# Altium PCB 双旋翼飞控pcb.PcbDoc
Units mil, origin at the board's own origin, x right, y up, seen from the top; angles counter-clockwise.
Board outline 2235.03 x 1960.03 mil, 2 copper layers (Top Layer, Bottom Layer); 72 components, 55 nets, 279 pads, 87 vias.
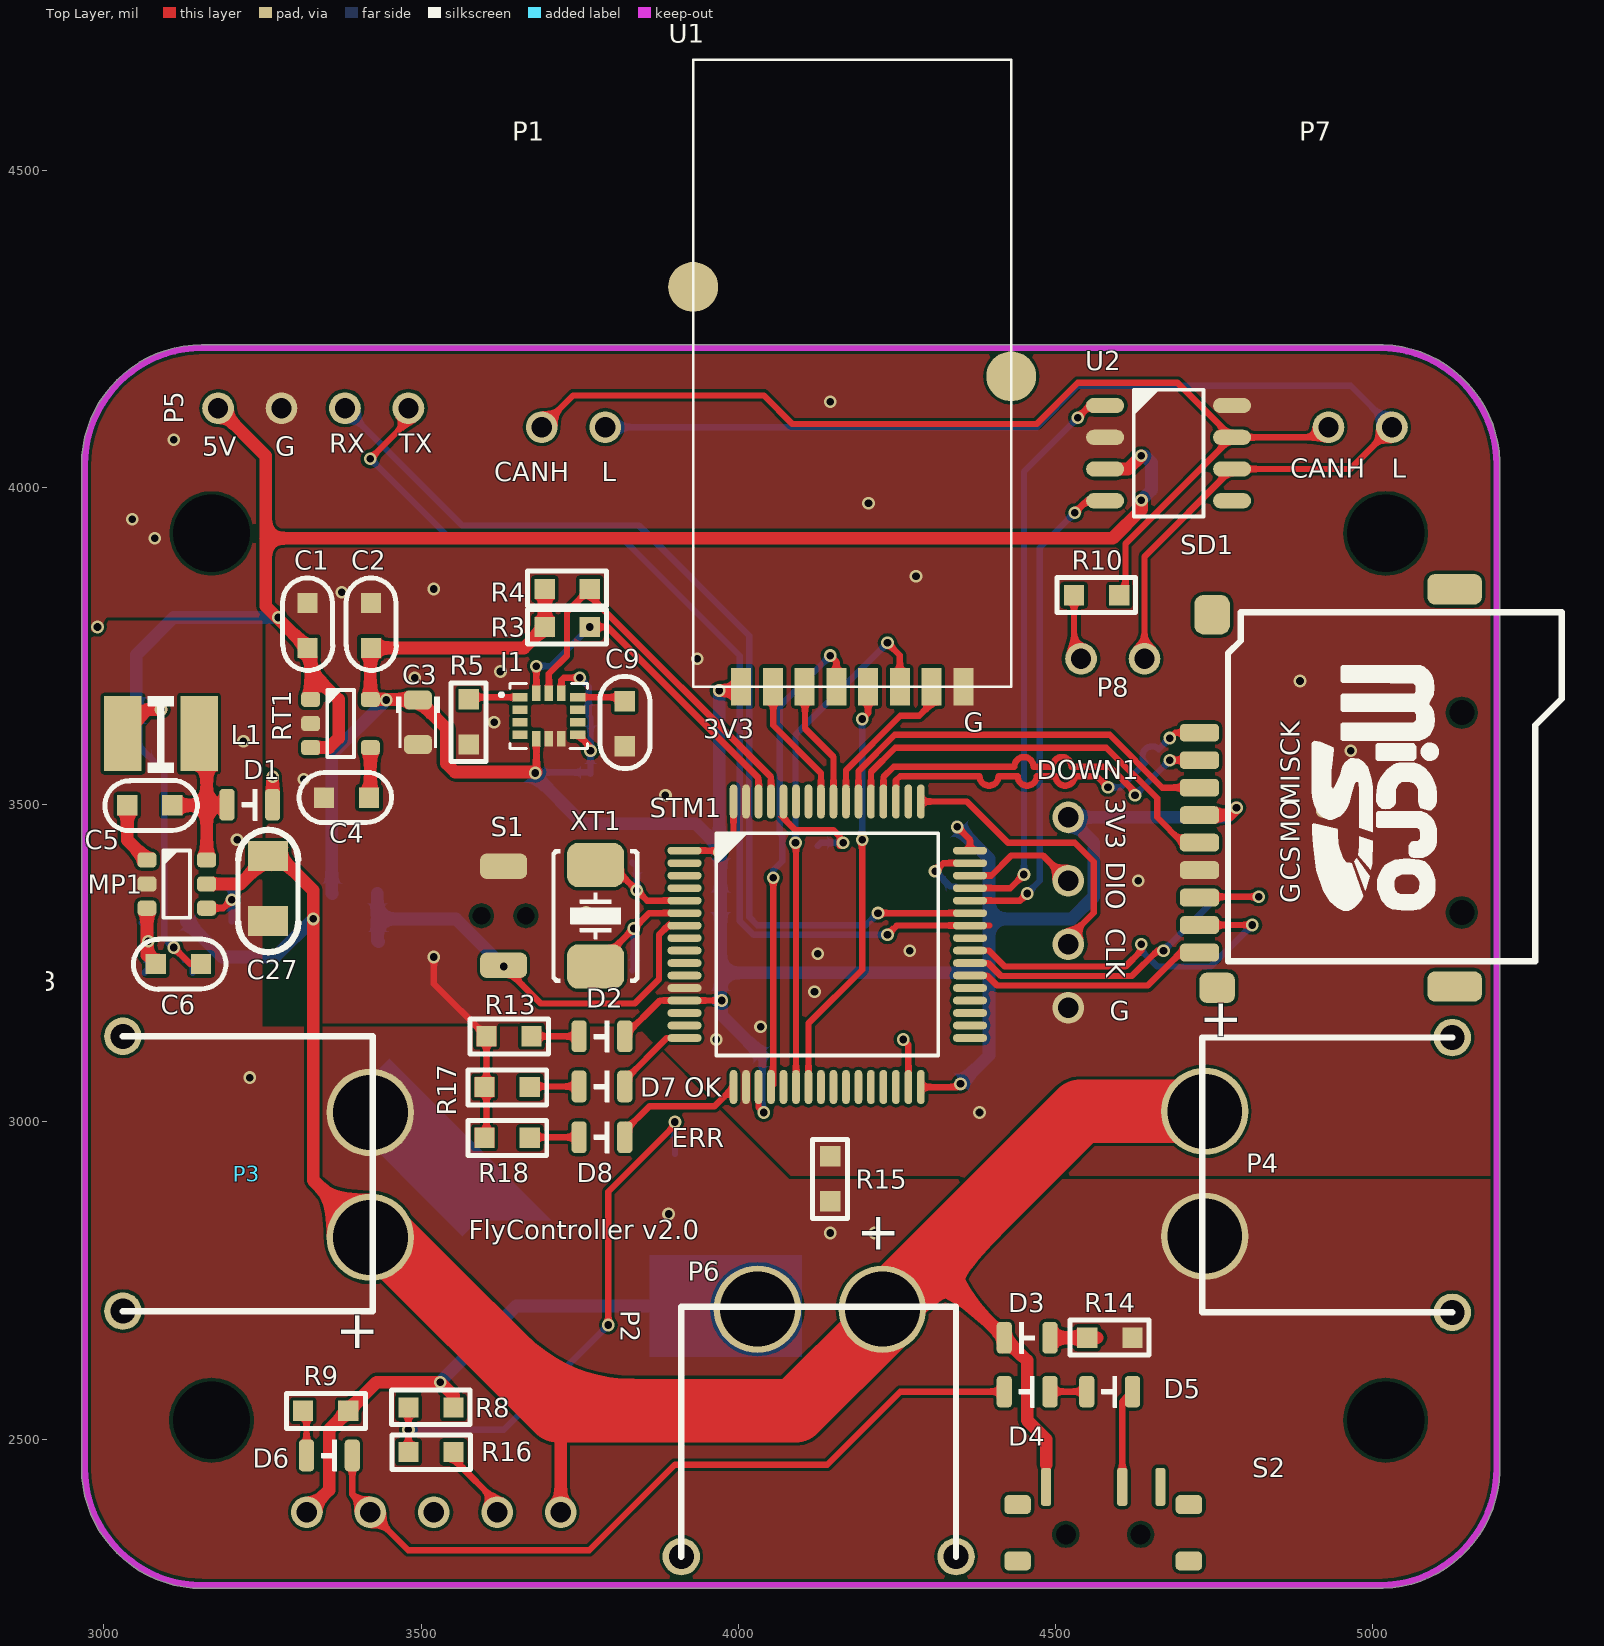
[diagram p0: Top Layer view]
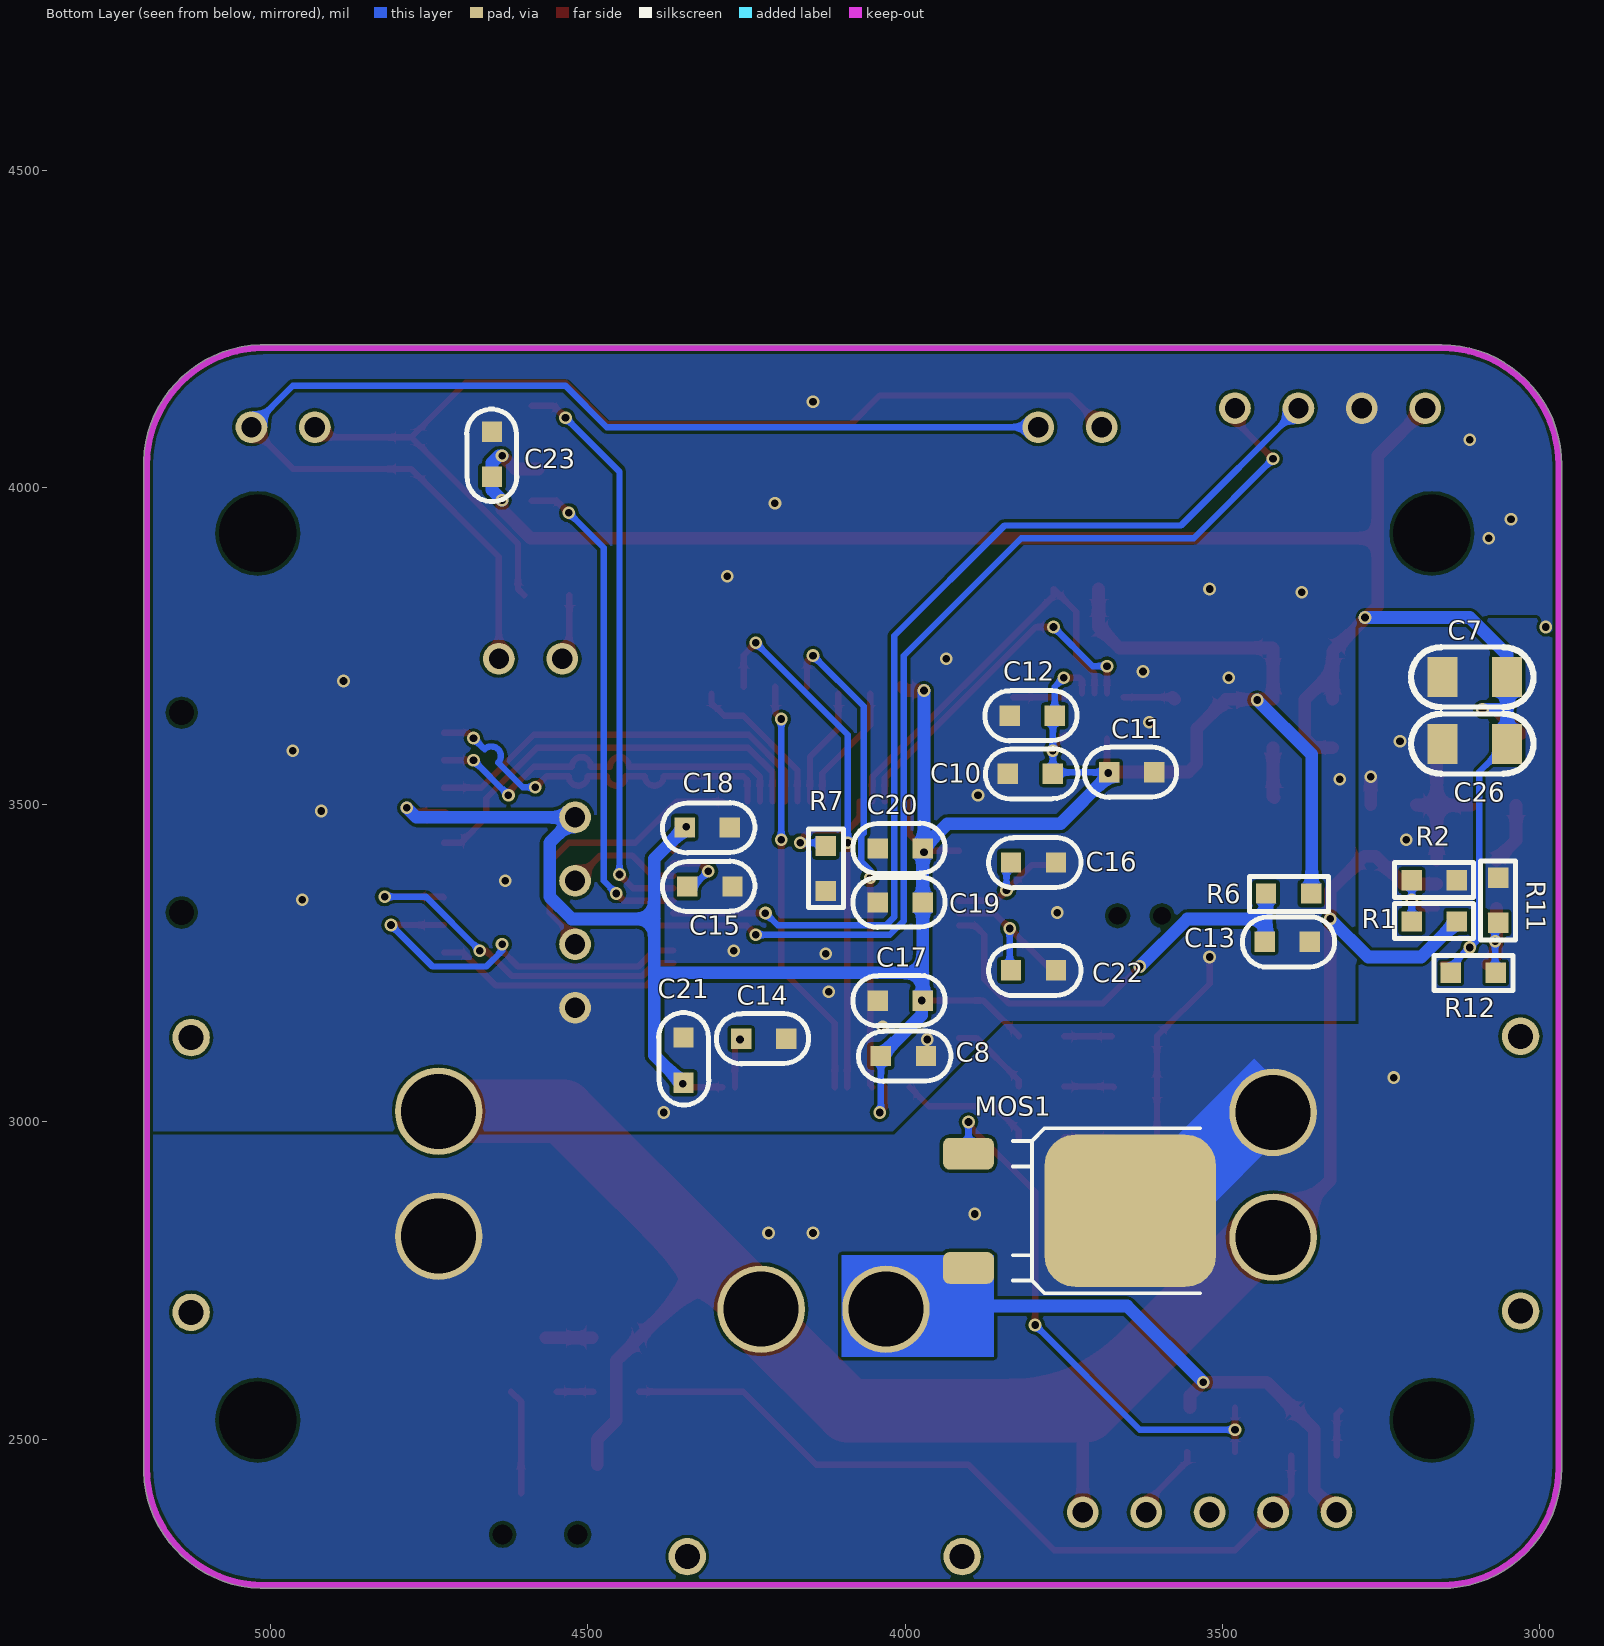
[diagram p1: Bottom Layer view, seen from below]
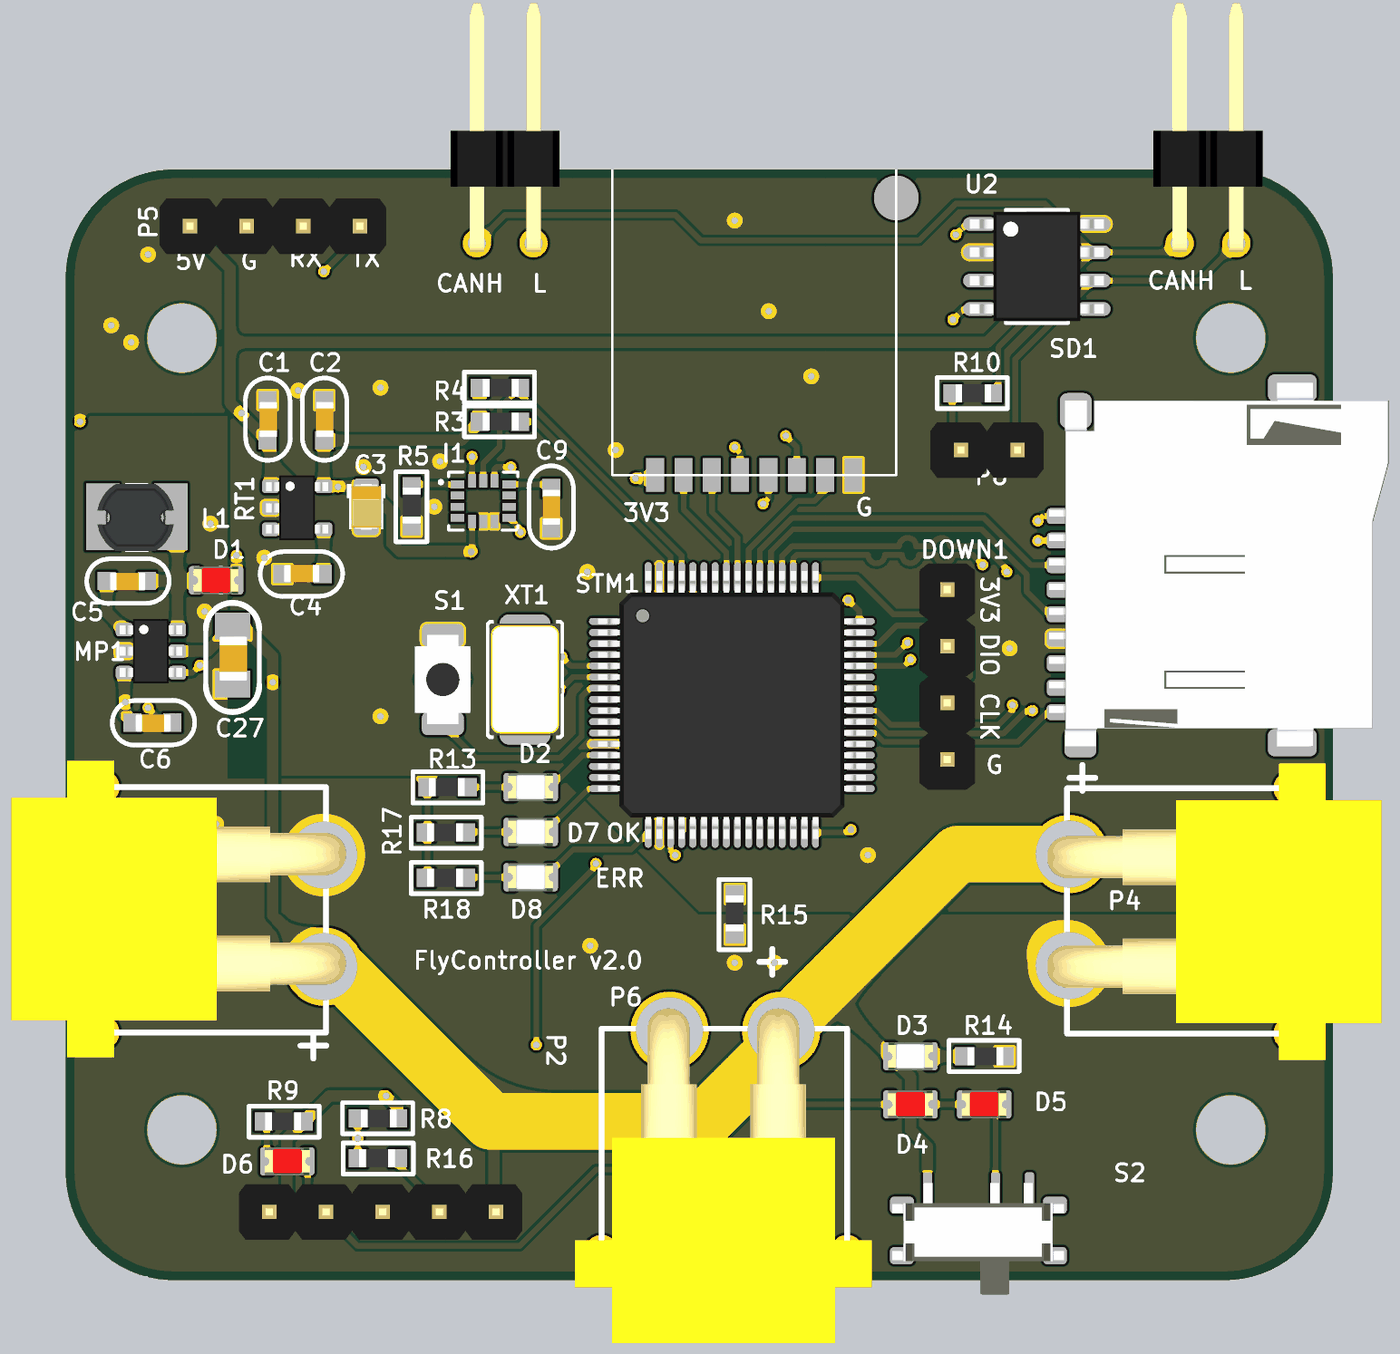
[diagram p2: 3D render of the assembled board from above, using the file's embedded part models]
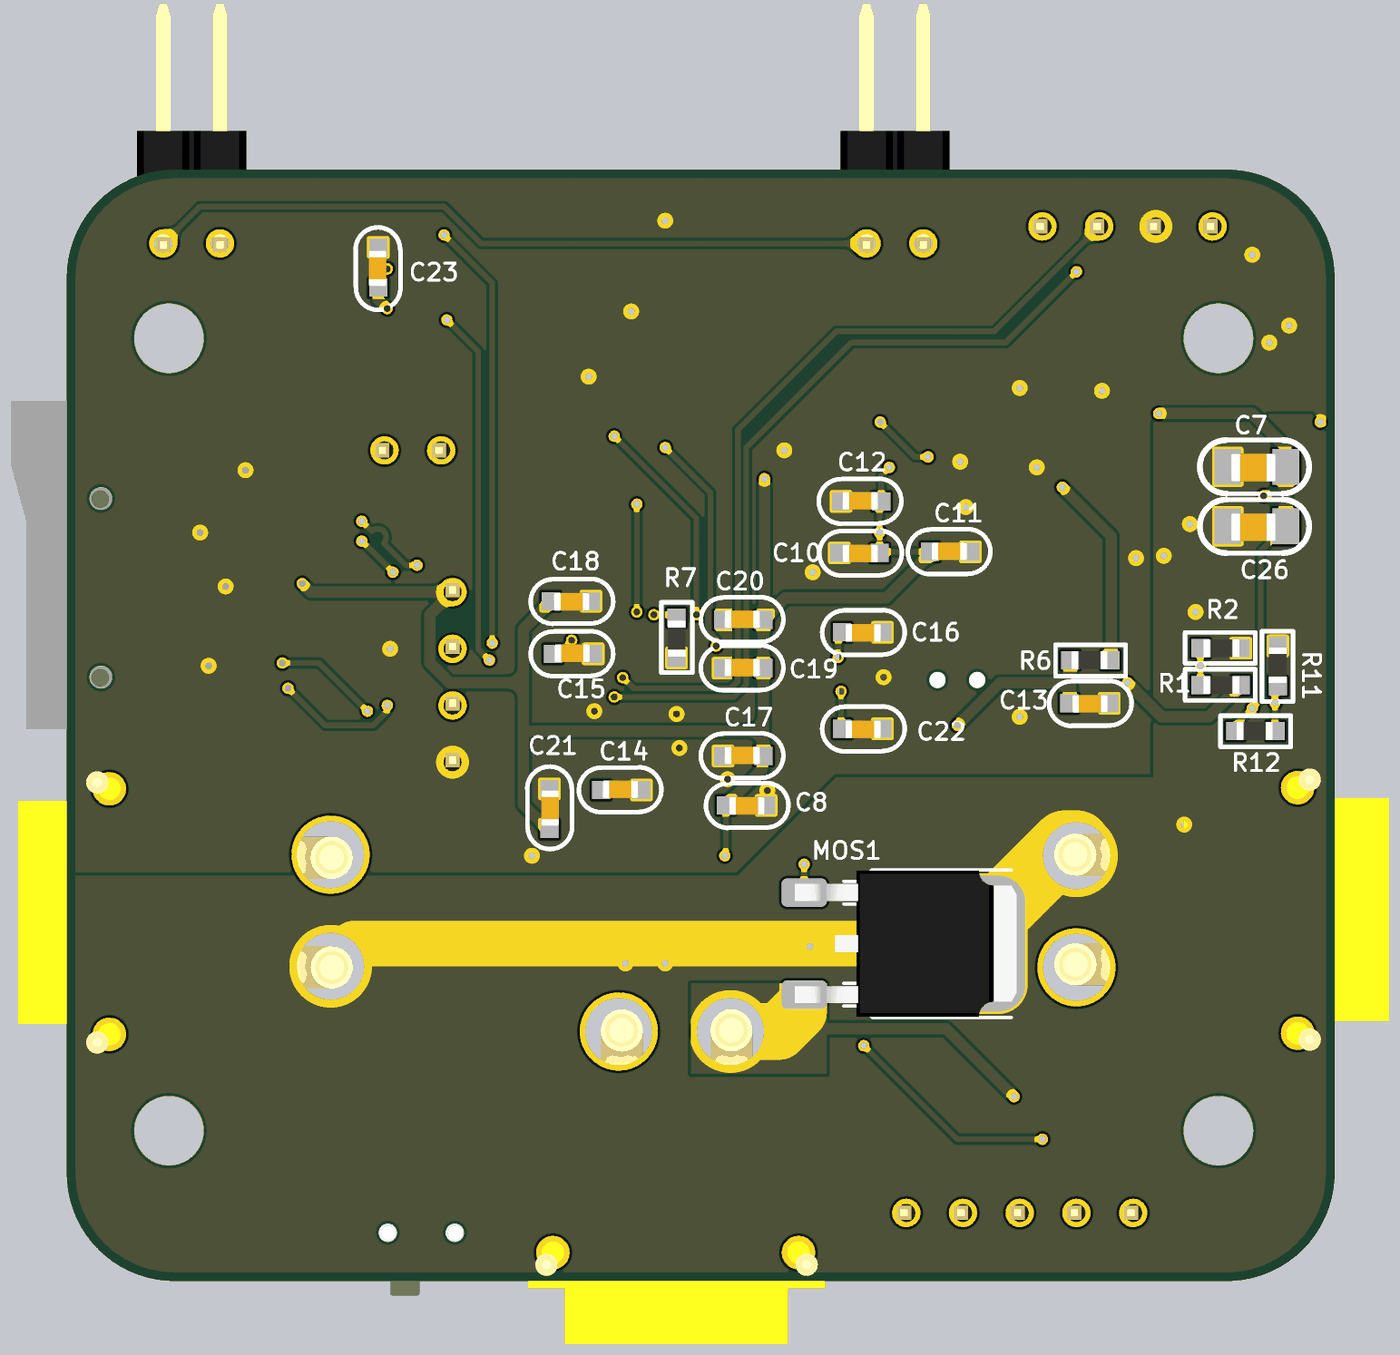
[diagram p3: 3D render of the assembled board from below, using the file's embedded part models]

## Layer stack, top to bottom
Top Solder: solder mask 0.4, Solder Resist, Dk 3.5
Top Layer: signal copper 1.4
Dielectric 1: dielectric 12.6, FR-4, Dk 4.8
Bottom Layer: signal copper 1.4
Bottom Solder: solder mask 0.4, Solder Resist, Dk 3.5

## Board outline
2964.99,2454.97 cw(c2970,2455) 2964.99,2455 2964.99,4035 cw(c3155,4035) 3154.97,4225.01 cw(c3155,4220) 3155,4225.02 5015,4225.02 cw(c5015,4220) 5015.96,4224.92 cw(c5010,4035) 5199.92,4040.96 cw(c5195,4040) 5200.02,4040 5200.02,2450 cw(c5195,2450) 5199.92,2449.04 cw(c5010,2455) 5015.96,2265.08 cw(c5015,2270) 5015,2264.99 3155,2264.99 cw(c3155,2455)

## Design rules (kind name [scope] priority, off if disabled: settings)
Clearance [All] p1: gap=5 ignorepadtopadclearanceinfootprint=FALSE
PlaneConnect [All] p1: planeconnectstyle=Direct reliefexpansion=20 reliefentries=4 reliefconductorwidth=10 reliefairgap=10
PolygonConnect [All] p1: connectstyle=Direct reliefconductorwidth=10 reliefentries=4 polygonreliefangle="90 Angle" airgapwidth=10
RoutingVias [All] p1: holewidth=28 width=50 viastyle="Through Hole" minholewidth=28 minwidth=50 maxholewidth=28 maxwidth=50
SolderMaskExpansion [All] p1: expansion=4
Width [All] p1: maxlimit=200 minlimit=10 preferedwidth=10 minimp=50.000000 maximp=50.000000 favimp=50.000000
29 further rules are at their usual default settings.

## Classes and differential pairs
component class 飞控: C8 C9 C10 C11 C12 C13 C14 C15 C16 C17 C18 C19 C20 C21 C22 D2 D3 D7 D8 DOWN1 I1 P5 R3 R4 R5 R6 R7 R13 R14 R15 R17 R18 S1 SD1 STM1 U1 XT1
component class power: C1 C2 C3 C4 C5 C6 C7 C23 C26 C27 D1 D4 D5 D6 L1 MOS1 MP1 P1 P2 P3 P4 P6 P7 P8 R1 R2 R8 R9 R10 R11 R12 R16 RT1 S2 U2

## Components (designator, comment, footprint, x,y, rotation, side; value= is the part's Value field where it differs from the comment)
C1 "Cap_0603" CAP_0603 3320,3785 r270 top value=1u
C2 "Cap_0603" CAP_0603 3420,3785 r270 top value=0.1u
C3 "Cap_Tan_0805" CAP_TAN_P0805 3495,3630 r270 top value=10u
C4 "Cap_0603" CAP_0603 3380,3510 r0 top value=22n
C5 "Cap_0603" CAP_0603 3075,3500 r180 top value=0.1u
C6 "Cap_0603" CAP_0603 3120,3250 r180 top value=33pF
C7 "Cap_0805" CAP_0805 3105,3700 r180 bottom value=10u
C8 "Cap_0603" CAP_0603 4000,3105 r0 bottom value=0.1u
C9 "Cap_0603" CAP_0603 3820,3630 r270 top value=0.1uF
C10 "Cap_0603" CAP_0603 3800,3550 r0 bottom value=0.1uF
C11 "Cap_0603" CAP_0603 3645,3550 r180 bottom value=0.1uF
C12 "Cap_0603" CAP_0603 3802,3639 r180 bottom value=0.1uF
C13 "Cap_0603" CAP_0603 3395,3285 r0 bottom value=0.1u
C14 "Cap_0603" CAP_0603 4225,3130 r180 bottom value=0.1u
C15 "Cap_0603" CAP_0603 4310,3370 r180 bottom value=0.1u
C16 "Cap_0603" CAP_0603 3795,3410 r0 bottom value=20pf
C17 "Cap_0603" CAP_0603 4010,3190 r180 bottom value=0.1u
C18 "Cap_0603" CAP_0603 4309,3465 r0 bottom value=0.1u
C19 "Cap_0603" CAP_0603 4010,3345 r180 bottom value=0.1u
C20 "Cap_0603" CAP_0603 4010,3430 r180 bottom value=0.1u
C21 "Cap_0603" CAP_0603 4350,3100 r270 bottom value=0.1u
C22 "Cap_0603" CAP_0603 3795,3240 r0 bottom value=20pf
C23 "Cap_0603" CAP_0603 4650,4050 r90 bottom value=0.1u
C26 "Cap_0805" CAP_0805 3105,3595 r180 bottom value=10u
C27 "Cap_0805" CAP_0805 3260,3365 r90 top value=10u
D1 "Diode" LED_0805_RED#1 3230,3500 r180 top
D2 "D_0805" LED_0805_YELLOW#1 3785,3135 r180 top
D3 "D_0805" LED_0805_YELLOW#1 4455,2660 r0 top
D4 "Diode" LED_0805_RED#1 4455,2575 r180 top
D5 "Diode" LED_0805_RED#1 4585,2575 r180 top
D6 "LED_0805" LED_0805_RED#2 3355,2475 r0 top
D7 "D_0805" LED_0805_YELLOW#2 3785,3055 r0 top
D8 "D_0805" LED_0805_YELLOW#2 3785,2975 r0 top
DOWN1 "HDR1x4_2.54" HDR1x4_2.54_180 4520,3480 r0 top
I1 "ICM20600" ICM20600 3700,3640 r0 top
L1 "Ind_CD32" IND_CD52 3090,3605 r180 top value=10uH
MOS1 "MOSFET_N" TO-252AA 3900,2950 r270 bottom value=NMOS?
MP1 "MP2451" SOT23-6 3115,3375 r0 top
P1 "HDR1x2_2.54" HDR1X2_2.54_90 3690,4095 r90 top
P2 "HDR1x5_2.54" HDR1X5_2.54_180 3720,2385 r270 top
P3 "Connector" XT30_PW_M 3140,2765 r90 top
P4 "Connector" XT30_PW_M 5015,3070 r270 top
P5 "HDR1x4_2.54" HDR1x4_2.54_180 3480,4125 r270 top
P6 "Connector" XT30_PW_M 4280,2425 r180 top
P7 "HDR1x2_2.54" HDR1X2_2.54_90 4930,4095 r90 top
P8 "HDR1x2_2.54" HDR1X2_2.54_180 4640,3730 r270 top
R1 "Res_0603" RES_0603 3164.41,3398 r180 bottom value=20K
R2 "Res_0603" RES_0603 3164.41,3463 r180 bottom value=10K
R3 "Res_0603" RES_0603 3732,3862 r0 top value=10K
R4 "Res_0603" RES_0603 3732,3922 r0 top value=10K
R5 "Res_0603" RES_0603 3493,3632 r90 top value=10K
R6 "Res_0603" RES_0603 3397,3278 r0 bottom value=10K
R7 "Res_0603" RES_0603 4043,3398 r270 bottom value=10K
R8 "Res_0603" RES_0603 3517,2632 r0 top value=4.7K
R9 "Res_0603" RES_0603 3348,2463 r180 top value=4.7K
R10 "Res_0603" RES_0603 4566,3912 r0 top value=120R
R11 "Res_0603" RES_0603 3147,3351 r90 bottom value=56K
R12 "Res_0603" RES_0603 3106,3153 r0 bottom value=300K
R13 "Res_0603" RES_0603 3637,3053 r180 top value=10K
R14 "Res_0603" RES_0603 4587,2742 r0 top value=10K
R15 "Res_0603" RES_0603 4063,2912 r90 top value=0R
R16 "Res_0603" RES_0603 3514,2398 r180 top value=10R
R17 "Res_0603" RES_0603 3634,2973 r180 top value=10K
R18 "Res_0603" RES_0603 3634,2893 r180 top value=10K
RT1 "RT9193" SOT23-5 3373,3628 r0 top
S1 "ButtonTACT_3x4x2_180" ButtonTACT_3x4x2_180H 3630,3325 r90 top
S2 "SwitchSPDT_2.8x6.6_90" SwitchSPDT_2.8X6.6_90 4575,2350 r0 top
SD1 "SD_Card_TF" SD_Card_TF 4726.61,3613.5 r270 top
STM1 "STM32F4" LQFP_P0.5_64 4140,3280 r0 top
U1 "NRF24l01_E01_SPI3" E01-ML01SP2 4425.24,3694.88 r90 top
U2 "TJA1050" SOP_E150_8 4680,4050 r270 top
XT1 "XTAL_5032_2P" XT_5032_2 3775,3325 r90 top value=8M

## Footprints (in the part's own frame and the unit in brackets; to place one, negate y for a bottom-side part, rotate by r counter-clockwise, add the part's x,y. Pads: shape width x height; smd on the part's side, far side on the other; paste and mask are expansions set on the pad)
ButtonTACT_3x4x2_180H [mil]
  round 0 hole 28: 0(0,35) 0(0,-35)
  rrect50% 40x74 smd: 1(-78,0) 2(78,0)
  body extent -79,-49 79,49, height 63
CAP_0603 [mil]
  rect 32x32 smd: 1(-33,1) 2(38,1)
  silkscreen extent -72,-38 73,41, body extent -30,-14 33,18, height 31
CAP_0805 [mil]
  rect 47.24x62.99 smd: 1(-48,1) 2(54,1)
  silkscreen extent -98,-46 95,48, body extent -42,-25 36,24, height 39
CAP_TAN_P0805 [mil]
  rrect50% 30x44 smd: 1(-35,0) 2(35,0)
  silkscreen extent -40,-34 40,34, body extent -40,-27 40,27, height 59
E01-ML01SP2 [mm]
  rect 1.5x0.8 smd: 1(-0.225,10.689) 2(-0.225,9.419) 3(-0.225,8.149) 4(-0.225,6.879) 5(-0.225,5.609) 6(-0.225,4.339) 7(-0.225,3.069) 8(-0.225,1.799)
  round 2 smd: 10(12.195,-0.121) 11(15.775,12.609)
  silkscreen extent -0.23,-0.12 24.87,12.61
HDR1X2_2.54_90 [mil]
  round 50 hole 32: 1(0,0) 2(0,-100)
  body extent -15,-146 424,46, height 99
HDR1X2_2.54_180 [mil]
  round 50 hole 32: 1(0,0) 2(0,-100)
  body extent -49,-150 49,50, height 323
HDR1x4_2.54_180 [mil]
  round 50 hole 32: 1(0,0) 2(0,-100) 3(0,-200) 4(0,-300)
  body extent -49,-350 49,50, height 323
HDR1X5_2.54_180 [mil]
  round 50 hole 32: 1(0,0) 2(0,-100) 3(0,-200) 4(0,-300) 5(0,-400)
  body extent -49,-450 49,50, height 323
ICM20600 [mm]
  rect 0.61x0.35 smd: 1(-1.127,0.746) 2(-1.127,0.246) 3(-1.127,-0.254) 4(-1.127,-0.754) 8(1.193,-0.754) 9(1.193,-0.254) 10(1.193,0.246) 11(1.193,0.746)
  rect 0.35x0.61 smd: 5(-0.467,-0.914) 6(0.033,-0.914) 7(0.533,-0.914) 12(0.533,0.906) 13(0.033,0.906) 14(-0.467,0.906)
  silkscreen extent -1.94,-1.3 1.58,1.3
IND_CD52 [mil]
  rect 59.06x118.11 smd: 1(-60,-7) 2(60,-7)
  silkscreen extent -20,-66 20,54, body extent -66,-65 70,53, height 83
LED_0805_RED#1 [mil]
  rrect50% 24x50 smd: 1(-36,0) 2(36,0)
  silkscreen extent -12,-24 12,24, body extent -40,-25 40,25, height 43
LED_0805_RED#2 [mil]
  rrect50% 24x50 smd: 1(36.5,-0.5) 2(-35.5,-0.5)
  silkscreen extent -12,-25 12,24, body extent -39,-25 40,24, height 43
LED_0805_YELLOW#1 [mil]
  rrect50% 24x50 smd: 1(-36,0) 2(36,0)
  silkscreen extent -12,-24 12,24, body extent -40,-25 40,25, height 43
LED_0805_YELLOW#2 [mil]
  rrect50% 24x50 smd: 1(36,1) 2(-36,1)
  silkscreen extent -12,-24 12,26, body extent -40,-24 40,26, height 43
LQFP_P0.5_64 [mil]
  oval 54x12 smd: 1(-225,147.64) 2(-225,127.95) 3(-225,108.27) 4(-225,88.58) 5(-225,68.9) 6(-225,49.21) 7(-225,29.53) 8(-225,9.84) 9(-225,-9.84) 10(-225,-29.53) 11(-225,-49.21) 12(-225,-68.9) 13(-225,-88.58) 14(-225,-108.27) 15(-225,-127.95) 16(-225,-147.64) 33(225,-147.64) 34(225,-127.95) 35(225,-108.27) 36(225,-88.58) 37(225,-68.9) 38(225,-49.21) 39(225,-29.53) 40(225,-9.84) 41(225,9.84) 42(225,29.53) 43(225,49.21) 44(225,68.9) 45(225,88.58) 46(225,108.27) 47(225,127.95) 48(225,147.64)
  oval 12x54 smd: 17(-147.64,-225) 18(-127.95,-225) 19(-108.27,-225) 20(-88.58,-225) 21(-68.9,-225) 22(-49.21,-225) 23(-29.53,-225) 24(-9.84,-225) 25(9.84,-225) 26(29.53,-225) 27(49.21,-225) 28(68.9,-225) 29(88.58,-225) 30(108.27,-225) 31(127.95,-225) 32(147.64,-225) 49(147.64,225) 50(127.95,225) 51(108.27,225) 52(88.58,225) 53(68.9,225) 54(49.21,225) 55(29.53,225) 56(9.84,225) 57(-9.84,225) 58(-29.53,225) 59(-49.21,225) 60(-68.9,225) 61(-88.58,225) 62(-108.27,225) 63(-127.95,225) 64(-147.64,225)
  silkscreen extent -175,-175 175,175, body extent -236,-236 236,236, height 59
RES_0603 [mil]
  rect 32x32 smd: 1(-37,-82) 2(34,-82)
  silkscreen extent -64,-109 60,-54, body extent -31,-98 31,-66, height 18
SD_Card_TF [mil]
  rrect50% 48x86 smd: 0(-226,402) 0(400,402)
  rrect50% 62x56 smd: 0(-186,20)
  round 30 hole 39.37 mask+0: 0(-31.5,413.39) 0(283.46,413.39)
  rrect50% 48x56 smd: 0(402,28)
  rrect50% 28x62 smd: 1(0,0) 2(43.31,0) 3(86.61,0) 4(129.92,0) 5(173.23,0) 6(216.54,0) 7(259.84,0) 8(303.15,0) 9(346.46,0)
  silkscreen extent -190,45 360,571, body extent -235,-27 407,572, height 79
SOP_E150_8 [mil]
  oval 24x60 smd: 1(-79,-102) 2(-29,-102) 3(21,-102) 4(71,-102) 5(71,98) 6(21,98) 7(-29,98) 8(-79,98)
  silkscreen extent -104,-57 96,53, body extent -100,-120 92,116, height 69
SOT23-5 [mil]
  rrect50% 30x24 smd: 1(-47,38) 2(-47,0) 3(-47,-38) 4(47,-38) 5(47,38)
  silkscreen extent -21,-53 21,53, body extent -55,-57 55,57, height 57
SOT23-6 [mil]
  rrect50% 30x24 smd: 1(-47,38) 2(-47,0) 3(-47,-38) 4(47,-38) 5(47,0) 6(47,38)
  silkscreen extent -21,-53 21,53, body extent -55,-57 55,57, height 57
SwitchSPDT_2.8X6.6_90 [mil]
  rrect50% 42x30 smd: 0(-135,-42) 0(-135,47) 0(135,-42) 0(135,47)
  round 10 hole 31.5: 0(-59.06,0) 0(59.06,0)
  rrect50% 16x60 smd: 1(90,75) 2(30,75) 3(-90,75)
  body extent -152,-111 151,86, height 55
TO-252AA [mil]
  rrect40% 50x80 smd: 1(0,0) 3(180,0)
  rrect40% 240x270 smd: 4(90,255)
  silkscreen extent -40,70 220,365, body extent -39,-17 219,374, height 91
XT30_PW_M [mm]
  round 1.5 hole 1: 0(-1.602,2.794) 0(9.398,2.794)
  round 3.5 hole 3: 1(1.35,-7.112) 2(6.35,-7.112)
  silkscreen extent -1.6,-7.21 9.4,2.79, body extent -2.71,-8.12 10.59,6.89, height 5
XT_5032_2 [mil]
  rrect50% 70x90 smd: 1(-80,0) 2(80,0)
  silkscreen extent -104,-68 104,68, body extent -98,-63 98,63, height 39

## Part data
C1 C2 C3 C4 C5 C6 C7 C8 C9 C10 C11 C12 C13 C14 C15 C16 C17 C18 C19 C20 C21 C22 C23 C26 C27: "Capacitor"
D6: "LED"
DOWN1 P1 P2 P5 P7 P8: "Header"
L1: "Inductor"
MOS1: "MOSFET"
P3 P4 P6: library part 2P
R1 R2 R3 R4 R5 R6 R7 R8 R9 R10 R11 R12 R13 R14 R15 R16 R17 R18: "Resistor"
RT1: "Power"
S1: "Button"
S2: "Switch"
SD1: "SD"
STM1: library part STM32F405R, "MCU"
U1: library part NRF24l01_E01_SPI2
XT1: "Crystal Oscillator"

## Free pads (board coordinates)
  round 30 hole 122.05: 3(3169.68,2530) 3(3169.68,3927.64) 3(5020,2530) 3(5020,3927.64)

## Via types
v1: diameter 20, hole 12, Top Layer to Bottom Layer, 87 vias

## Nets (pads, with @x,y where several pads share a name; then routed paths per layer and width w, separated by ;. In a path a pad name is that pad's centre, name@x,y a point inside that pad or via, vN(x,y) a via of type N, cw(c..) or ccw(c..) an arc to the next point about the centre after c; other vN are vias at no path point)
3V3: C2.2 C3.1 C8.2 C10.1 C11.1 C12.2 C17.2 C18.2 C19.2 C20.2 C21.2 D2.1 DOWN1.1 I1.5 I1.8 I1.12 R3.1 R4.1 R6.1 RT1.5 SD1.4 STM1.1 STM1.13 STM1.19 STM1.32 STM1.48 STM1.64 U1.1 | length 4610.9
  Top Layer w10: v1@3681.63,3551.63 I1.5 ; I1.12 3721,3696 3725,3700 v1(3750,3700) ; I1.8 3767,3590.28 v1(3767,3585) ; D2.1 3821,3136 3876.42,3191.42 STM1.13 v1(3973.58,3191.42) ; STM1.1 3967.36,3427.64 3992.36,3452.64 STM1.64 ; STM1.19 4031.73,3023.27 v1(4040,3015) ; STM1.32 4345,3055 v1(4350,3060) ; v1(4345,3465) 4365,3445 STM1.48
  Top Layer w20: v1@3681.63,3551.63 3553.37,3551.63 3540,3565 3540,3620 C3.1 3494,3666 RT1.5 3420,3746 C2.2 3662,3747 R3.1 R4.1 ; v1(3970,3680) 3998.39,3680 U1.1 ; SD1.4 4773.58,3483.58 v1(4785,3495)
  Bottom Layer w10: C11.1 3765,3551 C10.1 v1(3767,3585) 3767,3637 C12.2 3764,3686 v1(3750,3700) ; 3965,3460 3965,3438 3965,3432.22 3970,3427.22 C20.2@3972,3425.22 ; C8.2 4038,3017 v1(4040,3015)
  Bottom Layer w20: R6.1 3359,3361 3359,3579 v1(3445,3665) ; v1(3680,3550) 3680,3545 3755,3470 3933,3470 3965,3438 C20.2@3970,3433 ; C17.2@3967,3191 3972,3196 3972,3235 ; v1(3970,3425) 3970,3427.22 C20.2@3970,3433 ; v1(3970,3680) C20.2@3970,3433 ; v1(3973.58,3191.42) 3973.58,3168.42 C8.2 ; v1(4345,3465) 4395,3415 4395,3320 ; v1(4350,3060) 4395,3105 4395,3240 ; v1(4785,3495) 4770,3480 DOWN1.1 4560,3440 4560,3355 4525,3320 4395,3320 ; C20.2@3970,3433 C20.2 3972,3425.22 C19.2 3972,3235 ; 3972,3235 4390,3235 4395,3240 ; 4395,3240 4395,3320
5V: C1.2 C6.1 C7.2 C23.1 C26.2 L1.2 P5.4 R12.2 RT1.1 RT1.3 U2.3 | length 3215.3
  Top Layer w10: v1(3110,3275) 3136,3249 C6.1
  Top Layer w20: L1.2 3068,3650 v1(3090,3650) ; P5.4 3255,4050 3255,3920 ; RT1.3 3355,3590 3370,3605 3370,3666 3326,3710 ; RT1.1 3326,3710 ; U2.3 4614,4029 v1(4635,4050) ; v1(4635.18,3980) 4635.18,3965.18 4590,3920 3255,3920 ; 3255,3920 3255,3813 C1.2 3326,3742 3326,3710
  Bottom Layer w10: C26.2 3095,3552 3095,3290 v1(3110,3275) 3140,3245 R12.2
  Bottom Layer w20: C26.2 3051,3645 ; v1(3090,3650) 3056,3650 3051,3645 ; v1(3275,3795) 3110,3795 3051,3736 C7.2 3051,3645 ; v1(4635,4050) 4640,4050 4651,4039 C23.1 4651,3995.82 v1(4635.18,3980)
10V: D4.2 D6.1 P2.4 | length 1228.7
  Top Layer w10: D6.1 3391.5,2413.5 P2.4 3480,2325 3765,2325 3900,2460 4140,2460 4255,2575 D4.2
BGND: MOS1.3 P2.5 P6.2 R8.2 R9.1 | length 824
  Top Layer w20: P2.5 3355,2420 3355,2515 R9.1 3430,2590 v1(3530,2590) 3551,2569 R8.2
  Bottom Layer w20: v1(3530,2590) 3650,2710 3905,2710
CAN_RX: STM1.44 U2.4 | length 791.5
  Top Layer w10: STM1.44 4443.9,3348.9 v1(4455,3360) ; v1(4530,3960) 4549,3979 U2.4 U2.4@4588,3979
  Bottom Layer w10: v1(4455,3360) 4475,3380 4475,3905 v1(4530,3960)
CAN_TX: STM1.45 U2.1 | length 909.9
  Top Layer w10: STM1.45 4428.58,3368.58 v1(4450,3390) ; v1(4535,4110) 4554,4129 U2.1 U2.1@4588,4129
  Bottom Layer w10: v1(4450,3390) 4450,4025 v1(4535,4110)
CANH: P1.1 P7.1 R10.2 U2.7 | length 1671.3
  Top Layer w10: P1.1 3740,4145 4040,4145 4085,4100 4470,4100 4535,4165 4692,4165 U2.7 ; R10.2 4610,3840 4610,3911 U2.7 ; P7.1 4914,4079 U2.7
CANL: P1.2 P7.2 P8.1 U2.6 | length 1929.3
  Top Layer w10: P8.1 4640,3891 U2.6 4964,4029 P7.2
  Bottom Layer w10: P1.2 4470,4095 4535,4160 4965,4160 P7.2
ENA: MP1.4 R1.1 R2.1 | length 109.8
  Top Layer w10: MP1.4 3188.41,3337 v1(3201.41,3350)
  Bottom Layer w10: R1.1 v1(3201.41,3350) R2.1
GND: C1.1 C2.1 C3.2 C4.1 C8.1 C9.2 C10.2 C11.2 C12.1 C13.1 C14.2 C15.2 C16.1 C17.1 C18.1 C19.1 C20.1 C21.1 C22.1 C23.2 DOWN1.4 I1.6 I1.7 P5.3 R5.1 R7.2 R13.2 R15.2 R17.2 R18.2 RT1.2 S1.2 SD1.6 STM1.12 STM1.18 STM1.63 U1.8 U2.2 U2.8 | length 320.6
  Top Layer w10: v1(3520,3260) 3520,3218 R13.2 3603,2978 R18.2
  other v1: 4380,3015 3965,3130 4035,3150 4120,3205 4125,3265 4270,3270 3760,3330 4950,3350 4630,3380 4920,3490 3885,3515 3315,3540 4965,3585 3615,3630 4885,3695 3490,3700 3625,3710 3935,3730 2990,3780 3375,3835 3520,3840 4280,3860 3080,3920 3045,3950 4205,3975 3110,4075 4145,4135
LED_ERROR: D8.1 STM1.17 | length 209.9
  Top Layer w10: D8.1 3821,2986 3860,3025 3962.36,3025 STM1.17
LED_OK: D7.1 STM1.16 | length 131.5
  Top Layer w10: D7.1 3821,3066 3887.36,3132.36 STM1.16
NetC4_2: C4.2 RT1.4 | length 79.8
  Top Layer w20: C4.2 3420,3513 RT1.4
NetC5_1: C5.1 D1.2 L1.1 MP1.6 | length 290.4
  Top Layer w20: C5.1 3162,3499 ; L1.1 3162,3600 3162,3499 ; MP1.6 3162,3499 ; D1.2 3193,3499 3162,3499
NetC5_2: C5.2 MP1.1 | length 98.8
  Top Layer w20: C5.2 3037,3444 MP1.1
NetC6_2: C6.2 MP1.3 R11.1 R12.1 | length 179.4
  Top Layer w20: MP1.3 3068,3263 C6.2
  Bottom Layer w10: R11.1@3060,3314 3070,3304 v1(3070,3285) 3070,3241 R12.1@3064,3235
NetC9_1: C9.1 I1.11 | length 82.7
  Top Layer w10: I1.11 C9.1@3829.65,3669.35
NetC14_1: C14.1 STM1.31 | length 78.3
  Top Layer w10: v1(4260,3130) 4267.95,3122.05 STM1.31
NetC15_1: C15.1 STM1.47 | length 103.3
  Top Layer w10: v1(4310,3395) 4322.95,3407.95 STM1.47
  Bottom Layer w10: v1(4310,3395) 4334,3371 C15.1
NetD2_2: D2.2 R13.1 | length 75
  Top Layer w10: R13.1 D2.2
NetD3_2: D3.2 R14.1 | length 73
  Top Layer w20: D3.2@4492.71,2660 R14.1 R14.1@4565.71,2660
NetD4_1: D4.1 D5.2 | length 58
  Top Layer w10: D4.1 D5.2
NetD5_1: D5.1 S2.2 | length 166.6
  Top Layer w10: S2.2@4605,2415 S2.2 4605,2559 D5.1
NetD6_2: D6.2 R9.2 | length 72.8
  Top Layer w10: R9.2 3319.5,2539.5 D6.2
NetD7_2: D7.2 R17.1 | length 78.4
  Top Layer w10: R17.1 3672,3056 D7.2
NetD8_2: D8.2 R18.1 | length 78.4
  Top Layer w10: R18.1 3672,2976 D8.2
NetI1_1: I1.1 R5.2 | length 82
  Top Layer w10: R5.2@3578.35,3669.35 I1.1
  Top Layer w20: R5.2 R5.2@3578.35,3669.35
NetMOS1_1: MOS1.1 R8.1 R16.2 | length 866.8
  Top Layer w10: R16.2 v1(3480,2515) R8.1 ; v1(3795,2680) 3795,2890 3900,2995 v1(3900,3000)
  Bottom Layer w10: v1(3480,2515) 3630,2515 v1(3795,2680) ; MOS1.1 v1(3900,3000)
NetP2_2: P2.2 R16.1 | length 121.9
  Top Layer w10: R16.1@3555,2480 3555,2465 3620,2400 P2.2
NetP8_2: P8.2 R10.1 | length 104.6
  Top Layer w10: R10.1 4529,3741 P8.2
NetR7_1: R7.1 STM1.60 | length 191.1
  Top Layer w10: STM1.60 4071.1,3478.9 4090,3460 4150,3460 4160,3450 4160,3435 v1(4165,3440)
  Bottom Layer w10: R7.1 4130,3440 v1(4165,3440)
NRF_CE: STM1.57 U1.2 | length 201.1
  Top Layer w10: U1.2@4055,3675 4055,3625 4130.16,3549.84 STM1.57
NRF_CSN: STM1.56 U1.3 | length 188.6
  Top Layer w10: U1.3@4105,3675 4105,3620 4149.84,3575.16 STM1.56
NRF_IRQ: STM1.55 U1.7 | length 243.7
  Top Layer w10: STM1.55 4169.53,3554.53 4255,3640 4285,3640 4305,3660 U1.7@4305,3675
NRF_MISO: STM1.22 U1.6 | length 837.4
  Top Layer w10: v1(4090,3440) 4090.79,3439.21 STM1.22 ; v1(4235,3755) 4254.41,3735.59 U1.6
  Bottom Layer w10: v1(4090,3440) 4090,3610 v1(4235,3755)
NRF_MOSI: STM1.23 U1.5 | length 669.9
  Top Layer w10: STM1.23 4110.47,3155.47 4195,3240 v1(4195,3445) ; v1(4195,3635) 4204.41,3644.41 U1.5
  Bottom Layer w10: v1(4195,3445) v1(4195,3635)
NRF_SCK: STM1.20 U1.4 | length 774.8
  Top Layer w10: STM1.20 4055,3058.58 v1(4055,3385) ; v1(4145,3735) 4154.41,3725.59 U1.4
  Bottom Layer w10: v1(4055,3385) 4055,3396.86 4069,3410.86 4069,3451.14 4065.14,3455 4065.14,3655.14 v1(4145,3735)
NRST: C13.2 R6.2 S1.1 STM1.7 | length 707.9
  Top Layer w10: v1(3630,3245) 3688.27,3186.73 3836.73,3186.73 3875,3225 3875,3295 3889.53,3309.53 STM1.7
  Bottom Layer w20: R6.2 3431,3320 ; C13.2 3431,3286 3431,3320 ; v1(3630,3245) 3555,3320 3431,3320
OSC1: C16.2 STM1.5 XT1.2 | length 210.1
  Top Layer w10: XT1.2 3800,3405 v1(3840,3365) 3856.1,3348.9 STM1.5
  Bottom Layer w10: C16.2 3840,3402 v1(3840,3365)
OSC2: C22.2 STM1.6 XT1.1 | length 241.7
  Top Layer w10: XT1.1 v1(3835,3305) 3859.21,3329.21 STM1.6
  Bottom Layer w10: C22.2 3835,3241 v1(3835,3305)
PGND: C7.1 C26.1 C27.1 D1.1 MOS1.4 MP1.2 P3.2 P4.2 R2.2 R11.2 R14.2 R15.1 | length 44
  Top Layer w20: D1.1 v1(3266,3544)
  other v1: 4145,2825 4215,2825 3890,2855 3230,3070 3210,3445 3220,3600
SCL: I1.13 R4.2 STM1.61 | length 644.4
  Top Layer w10: I1.13 3701.32,3706.32 3730,3735 3730,3804 R4.2 3766,3829 4051.42,3543.58 STM1.61
SDA: I1.14 R3.2 STM1.62 | length 554
  Top Layer w10: I1.14 v1(3681.63,3718.37) ; v1(3766,3780) 3793.79,3780 4031.73,3542.05 STM1.62
  Bottom Layer w10: v1(3681.63,3718.37) 3704.37,3718.37 v1(3766,3780)
SDIO_CD: SD1.9 STM1.38 | length 389.7
  Top Layer w10: STM1.38 4391.79,3230.79 4407.57,3215 4645,3215 4697.05,3267.05 SD1.9
SDIO_CLK: SD1.5 STM1.53 | length 659.7
  Top Layer w10: STM1.53 4208.9,3551.47 4247.43,3590 4580,3590 4660,3510 4660,3480 4699.73,3440.28 SD1.5
SDIO_CMD: SD1.3 STM1.54 | length 643.4
  Top Layer w10: STM1.54 4189.21,3553 4246.21,3610 4585,3610 4668.11,3526.89 SD1.3
SDIO_D0: SD1.7 STM1.39 | length 610.3
  Top Layer w10: STM1.39 4393.31,3250.47 4413.79,3230 4620,3230 4660,3270 v1(4670,3270) ; SD1.7 4727.95,3355 v1(4820,3355)
  Bottom Layer w10: v1(4670,3270) 4755,3355 4756.34,3353.66 4757.68,3355 v1(4820,3355)
SDIO_D1: SD1.8 STM1.40 | length 606.6
  Top Layer w10: STM1.40 4394.84,3270.16 4420,3245 4610,3245 4635,3270 v1(4635,3280) ; SD1.8 v1(4810,3310.35)
  Bottom Layer w10: v1(4635,3280) 4635,3270 4660,3245 4744.65,3245 v1(4810,3310.35)
SDIO_D2: SD1.1 STM1.51 | length 625.8
  Top Layer w10: STM1.51 4248.27,3538.27 4255,3545 4350,3545 4380,3545 ccw(c4395,3545) 4410,3545 4440,3545 ccw(c4455,3545) 4470,3545 4500,3545 ccw(c4515,3545) 4530,3545 4545,3545 4565,3545 v1(4582.5,3527.5) ; v1(4680,3605) 4688.5,3613.5 SD1.1
  Bottom Layer w10: v1(4582.5,3527.5) 4602.5,3527.5 4641.25,3566.25 cw(c4651.86,3576.86) 4662.46,3587.46 4665,3590 v1(4680,3605)
SDIO_D3: SD1.2 STM1.52 | length 622.1
  Top Layer w10: STM1.52 4228.58,3543.58 4245,3560 4435,3560 cw(c4450,3560) 4465,3560 4495,3560 cw(c4510,3560) 4525,3560 4530,3560 4585,3560 4625,3520 v1(4625,3515) ; v1(4680,3570) 4680.2,3570.2 SD1.2
  Bottom Layer w10: v1(4625,3515) v1(4680,3570)
SWCLK: DOWN1.3 STM1.49 | length 458.3
  Top Layer w10: STM1.49 4360,3505 4425,3440 4530,3440 4560,3410 4560,3330 4520,3290 DOWN1.3
SWDIO: DOWN1.2 STM1.46 | length 184.7
  Top Layer w10: STM1.46 4398.27,3388.27 4430,3420 4480,3420 DOWN1.2
USART1_RX: P5.2 STM1.43 | length 1590.2
  Top Layer w10: v1(4220,3329.21) STM1.43
  Bottom Layer w10: P5.2 3565,3940 3843.28,3940 4017,3766.28 4017,3323 4030,3310 4200.79,3310 v1(4220,3329.21)
USART1_TX: P5.1 STM1.42 | length 1642
  Top Layer w10: v1(3420,4045) 3480,4105 P5.1 ; v1(4235,3295) 4249.53,3309.53 STM1.42 4395.47,3309.53
  Bottom Layer w10: v1(3420,4045) 3545,3920 3817,3920 4002,3735 4002,3316.79 4023.79,3295 v1(4235,3295)
VBAT: C27.2 D3.1 MP1.5 P2.1 P3.1 P4.1 P6.1 R1.2 S2.3 | length 3234.6
  Top Layer w20: MP1.5 3215,3375 C27.2 3276,3419 3330,3365 v1(3330,3320) 3330,2908.15 P3.1 ; 3715,2545 3720,2540 P2.1 ; 4300.43,2778.57 D3.1 4455,2624 4455,2530 4485,2500 4485,2460
  Top Layer w100: P3.1 3441.85,2818.15 3715,2545 4090,2545 4226.85,2681.85 P6.1 4300.43,2778.57 4538.7,3016.85 P4.1
  Bottom Layer w20: R1.2 3186.41,3260 3270,3260 v1(3330,3320)
pads on no net: I1.2 I1.3 I1.4 I1.9 I1.10 P2.3 P3.0 P4.0 P6.0 S1.0 S2.0 S2.1 SD1.0 STM1.2 STM1.3 STM1.4 STM1.8 STM1.9 STM1.10 STM1.11 STM1.14 STM1.15 STM1.21 STM1.24 STM1.25 STM1.26 STM1.27 STM1.28 STM1.29 STM1.30 STM1.33 STM1.34 STM1.35 STM1.36 STM1.37 STM1.41 STM1.50 STM1.58 STM1.59 U1.10 U1.11 U2.5

## Polygon pours and split planes (outlines as drawn)
GND on Top Layer "GND_L01_P004" (solid, remove dead copper, pour order 4): 2850,4265 2895,4310 5300,4310 5300,2815 5345,2770 5290,2715 2815,2715
PGND on Top Layer "PGND_L01_P000" (solid, remove dead copper, pour order 0): 2835,3785 2840,3790 3250,3790 3250,3150 3840,3150 4080,2910 5360,2910 5530,2740 5450,2660 5450,2125 2885,2125 2830,2180
GND on Bottom Layer "GND_L02_P006" (solid, remove dead copper, pour order 6): 2765,4385 5295,4385 5415,4265 5360,4210 5360,2870 2740,2870 2625,2985
PGND on Bottom Layer "PGND_L02_P002" (solid, remove dead copper, pour order 2): 2838.54,3788.74 2843.54,3793.74 3285,3793.74 3285,3153.74 3843.54,3153.74 4017.28,2980 5297.28,2980 5533.54,2743.74 5453.54,2663.74 5453.54,2128.74 2888.54,2128.74 2833.54,2183.74

## Keep-outs
Keep-Out Layer:
  lines w10: 5010,2270 ccw(c5010,2455) 5195,2455 ; 5010,4220 cw(c5010,4035) 5195,4035 ; 5015,2270 3155,2270 cw(c3155,2455) 2970,2455 2970,4035 cw(c3155,4035) 3155,4220 5015,4220 ; 5195,2450 5195,4040

## Other copper
Bottom Layer:
  rectangle net BGND: 3860,2630 4100,2790
  region net PGND: 3450,3100 3705,2845 3590,2845 3565,2820 3370,3015 3370,3020

## Silkscreen, mask and mechanical layers (free items; w line width, h text height)
Top Overlay:
  text "RX" at 3355,4055 h30
  text "TX" at 3465,4055 h30
  text "5V" at 3155,4050 h30
  text "G" at 3270,4050 h30
  text "CANH" at 4870,4015 h30
  text "L" at 5030,4015 h30
  text "CANH" at 3615,4010 h30
  text "L" at 3785,4010 h30
  text "G" at 4355,3615 h30
  text "3V3" at 3945,3605 h30
  text "SCK" at 4885,3550 h30 r90
  text "3V3" at 4580,3510 h30 r270
  text "MI" at 4885,3500 h30 r90
  text "MO" at 4885,3440 h30 r90
  text "DIO" at 4580,3410 h30 r270
  text "CS" at 4885,3380 h30 r90
  text "G" at 4885,3345 h30 r90
  text "CLK" at 4580,3305 h30 r270
  text "G" at 4585,3160 h30
  text "OK" at 3915,3040 h30
  text "ERR" at 3895,2960 h30
  text "FlyController v2.0" at 3575,2815 h30
Top Solder:
  lines w100: 3430,2840 3430,2830 3715,2545 4095,2545 4095,2550 4230,2685 ; 4226.85,2705 4226.85,2706.85 4536.85,3016.85 ; 4543.15,3016.85 4735,3016.85
  lines w120: 4720,2840 4735,2840
Bottom Solder:
  lines w80: 3655,2860 4695,2860
  lines w100: 3910,2740 3945,2705 4030,2705 ; 4226.85,2705 4250,2705
  lines w120: 3420,3035 3440,3035 3650,2825

## Dimensions
5020,3927.64 to 5020,2530 on Mechanical 1
3169.68,3927.64 to 5020,3927.64 on Mechanical 1
2940,4140 to 5570,4065 on Top Overlay
2705,4145 to 2630,2075 on Top Overlay

## Text inside footprints (layer, text, board x,y; h text height)
P3: Top Overlay "+" at 3425,2635 h60 r90
P4: Top Overlay "+" at 4735,3195 h60 r270
P6: Top Overlay "+" at 4255,2850 h60 r180